# EAGLE board SyncScan Standalone MK3 SMD (EAGLE 6.2)
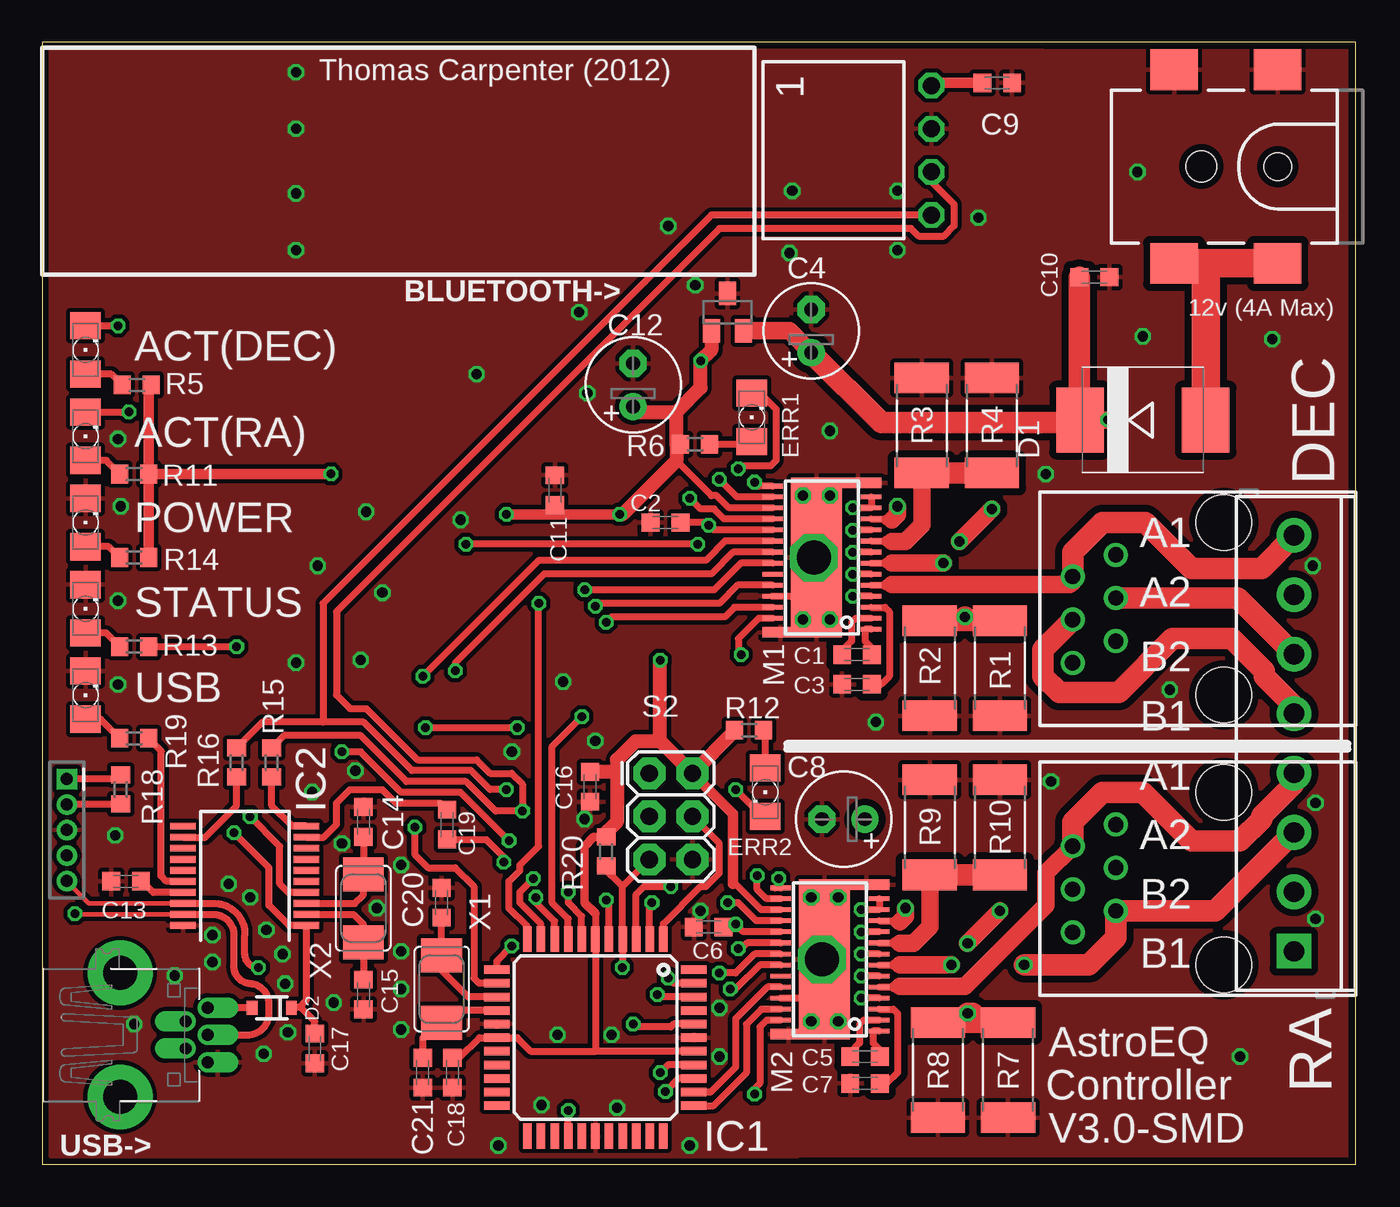
[diagram p0: board, top side]
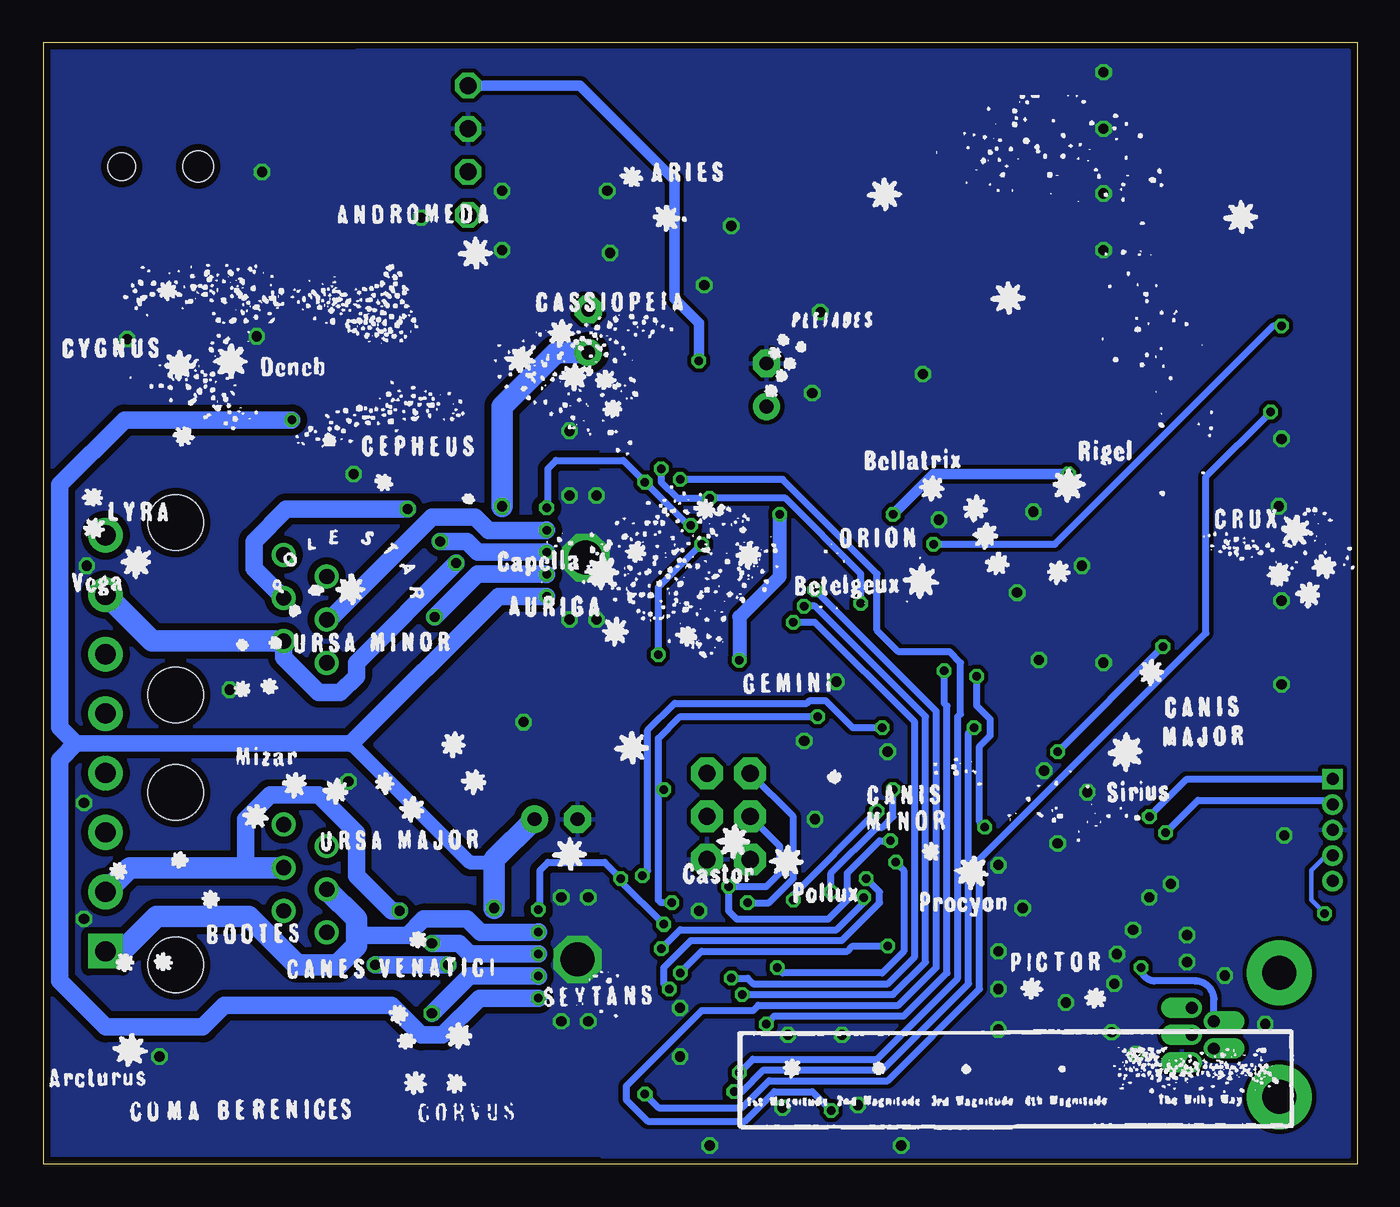
[diagram p1: board, bottom side, seen from below]

Size 77.31 x 66.04 mm. Coordinates in mm from the lower left corner, seen from the top.
Outline: 0,66.04 0,0 77.31,0 77.31,66.04 0,66.04
Copper layers (1*16): Top 0.035mm / dielectric 1.5mm / Bottom 0.035mm
Design rules: minimum track width 0.2mm, minimum drill 0.5mm, track to track 0.2mm, track to pad 0.2mm, pad to pad 0.2mm, via to via 0.2mm, smd to smd 0mil, copper to edge 10mil, drill to drill 0.2mm, minimum pad ring 10mil, minimum via ring 7mil, stop-mask expansion 0.125mm, vias tented up to drill 0mil, thermal gap 10mil
Net classes: 1 power: width 0.61 mm, drill 0.711 mm, clearance 0.203 mm; 2 gnd: width 0.305 mm, drill 0.711 mm, clearance 0.203 mm; 3 usbvcc: width 0.508 mm, drill 0.711 mm, clearance 0.203 mm

## Footprints (pad centres in the part's own frame; a part is rotated, then mirrored left to right if it is on the bottom)
1206 = smd 1.6 x 1.803: A -1.422,0; C 1.422,0
SSW-104-02-S-S-RA = drill 1 pad 1.5 octagon: 1 -3.81,1.524; 2 -1.27,1.524; 3 1.27,1.524; 4 3.81,1.524
C0603K = smd 1.05 x 1.08: 1 -0.875,0; 2 0.875,0
E2,5-6 = drill 0.813 pad 1.6: + -1.27,0 | drill 0.813 pad 1.6 octagon: - 1.27,0
SMC = smd 2.8 x 3.8: A 3.7,0; C -3.7,0
SOD-323 = smd 0.63 x 0.83: 1 -1.15,0; 2 1.15,0
RJ11-NO_SHIELD = drill 0.9 pad 1.4: 1 -3.175,8.89; 2 -1.905,6.35; 3 -0.635,8.89; 4 0.635,6.35; 5 1.905,8.89; 6 3.175,6.35 | hole 3.251: -5.08,0; 5.08,0
TQFP44 = smd 1.5 x 0.5: 1 -5.8,4; 2 -5.8,3.2; 3 -5.8,2.4; 4 -5.8,1.6; 5 -5.8,0.8; 6 -5.8,0; 7 -5.8,-0.8; 8 -5.8,-1.6; 9 -5.8,-2.4; 10 -5.8,-3.2; 11 -5.8,-4; 23 5.8,-4; 24 5.8,-3.2; 25 5.8,-2.4; 26 5.8,-1.6; 27 5.8,-0.8; 28 5.8,0; 29 5.8,0.8; 30 5.8,1.6; 31 5.8,2.4; 32 5.8,3.2; 33 5.8,4 | smd 0.5 x 1.5: 12 -4,-5.8; 13 -3.2,-5.8; 14 -2.4,-5.8; 15 -1.6,-5.8; 16 -0.8,-5.8; 17 0,-5.8; 18 0.8,-5.8; 19 1.6,-5.8; 20 2.4,-5.8; 21 3.2,-5.8; 22 4,-5.8; 34 4,5.8; 35 3.2,5.8; 36 2.4,5.8; 37 1.6,5.8; 38 0.8,5.8; 39 0,5.8; 40 -0.8,5.8; 41 -1.6,5.8; 42 -2.4,5.8; 43 -3.2,5.8; 44 -4,5.8
SSOP20 = smd 0.4 x 1.5: 1 -2.925,-3.625; 2 -2.275,-3.625; 3 -1.625,-3.625; 4 -0.975,-3.625; 5 -0.325,-3.625; 6 0.325,-3.625; 7 0.975,-3.625; 8 1.625,-3.625; 9 2.275,-3.625; 10 2.925,-3.625; 11 2.925,3.625; 12 2.275,3.625; 13 1.625,3.625; 14 0.975,3.625; 15 0.325,3.625; 16 -0.325,3.625; 17 -0.975,3.625; 18 -1.625,3.625; 19 -2.275,3.625; 20 -2.925,3.625
SOT23 = smd 1 x 1.4: 1 -0.95,-1.1; 2 0.95,-1.1; 3 0,1.1
PIC-ICSP-MINI = drill 0.7 square: 1 -3,0 | drill 0.7: 2 -1.5,0; 3 0,0; 4 1.5,0; 5 3,0
POWER_JACK_SMD = smd 2.8 x 2.4: GND 0,-5.7; P$4 6.1,-5.7; VIN0 0,5.7; VIN1 6.1,5.7 | hole 1.6: 0,0 | hole 1.8: 4.5,0
HTSSOP28PWP = smd 0.27 x 1.2: 1 -4.21,-2.9; 2 -3.575,-2.9; 3 -2.925,-2.9; 4 -2.275,-2.9; 5 -1.625,-2.9; 6 -0.975,-2.9; 7 -0.325,-2.9; 8 0.325,-2.9; 9 0.975,-2.9; 10 1.625,-2.9; 11 2.275,-2.9; 12 2.925,-2.9; 13 3.575,-2.9; 15 4.21,2.9; 16 3.575,2.9; 17 2.925,2.9; 18 2.275,2.9; 19 1.625,2.9; 20 0.975,2.9; 21 0.325,2.9; 22 -0.325,2.9; 23 -0.975,2.9; 24 -1.625,2.9; 25 -2.275,2.9; 26 -2.925,2.9; 27 -3.575,2.9 | smd 0.61 x 2.735: 14 4.395,-2.132 | smd 0.61 x 2.1: 28 -4.395,2.45 | smd 9.4 x 3: EXP 0,0.318
SCREWTERMINAL-3.5MM-8 = drill 1.2 pad 2.032 square: 1 0,0 | drill 1.2 pad 2.032: 2 3.5,0; 3 7,0; 4 10.5,0; 5 14,0; 6 17.5,0; 7 21,0; 8 24.5,0
2X3 = drill 1.016 pad 1.88 octagon: 1 0,0; 2 0,2.54; 3 2.54,0; 4 2.54,2.54; 5 5.08,0; 6 5.08,2.54
R2512 = smd 1.8 x 3.2: 1 -2.8,0; 2 2.8,0
R0603 = smd 1 x 1.1: 1 -0.85,0; 2 0.85,0
USB-MINIB-THM-MOLEX = drill 0.7 offset: D+ 0,9.72; D- -0.8,8.42; GND 1.6,9.72; ID 0.8,8.42; VBUS -1.6,9.72 | drill 2 pad 3.81: GND1 -3.65,4.57; GND4 3.65,4.57
NX5032 = smd 2 x 2.4: P$1 2,0; P$2 -2,0

## Placement (x,y rotation side)
ACT(DEC)  Green  [1206]  2.54,47.94 90 top
ACT(RA)  Green  [1206]  2.54,42.86 90 top
BLUETOOTH->  http://www.ebay.co.uk/itm/250991624201  [SSW-104-02-S-S-RA]  50.8,59.69 270 top
C1  10n  [C0603K]  47.94,30 180 top
C2  100n  [C0603K]  36.67,37.78 0 top
C3  100n  [C0603K]  47.94,28.26 0 top
C4  100u  [E2,5-6]  45.24,49.05 90 top
C5  10n  [C0603K]  48.42,6.35 180 top
C6  100n  [C0603K]  39.21,13.97 0 top
C7  100n  [C0603K]  48.42,4.76 0 top
C8  100u  [E2,5-6]  47.15,20.32 180 top
C9  100n  [C0603K]  56.2,63.66 0 top
C10  100n  [C0603K]  61.91,52.23 0 top
C11  100n  [C0603K]  30.16,39.69 90 top
C12  100u  [E2,5-6]  34.77,45.88 90 top
C13  470n  [C0603K]  4.92,16.67 0 top
C14  22p  [C0603K]  18.89,20.16 90 top
C15  22p  [C0603K]  18.89,10 270 top
C16  100n  [C0603K]  32.23,22.23 270 top
C17  100n  [C0603K]  16.03,6.83 270 top
C18  100n  [C0603K]  24.13,5.4 270 top
C19  100n  [C0603K]  23.81,20 270 top
C20  22p  [C0603K]  23.5,15.4 90 top
C21  22p  [C0603K]  22.38,5.4 270 top
D1  B550C-13  [SMC]  64.77,43.81 0 top
D2  1N4148  [SOD-323]  13.49,9.21 180 top
DEC  RJ11-4X  [RJ11-NO_SHIELD]  69.53,32.7 90 top
ERR1  Red  [1206]  41.75,43.97 90 top
ERR2  Red  [1206]  42.55,21.91 270 top
IC1  ATMEGA162-16AU  [TQFP44]  32.54,7.46 270 top
IC2  PIC18F14K50-I/SS  [SSOP20]  11.91,16.99 90 top
IC3  7805L  [SOT23]  40.32,50.16 0 top
ICSP  PIC-ICSP-MINI  [PIC-ICSP-MINI]  1.43,19.68 270 top
J1  POWER_JACKSMD  [POWER_JACK_SMD]  72.71,58.74 180 top
M1  DRV8824PWP  [HTSSOP28PWP]  45.88,35.72 90 top
M2  DRV8824PWP  [HTSSOP28PWP]  46.35,12.06 90 top
MOTOR2  Screw Terminal  [SCREWTERMINAL-3.5MM-8]  73.66,12.54 90 top
POWER  Red  [1206]  2.54,37.78 90 top
PROG  PRG  [2X3]  35.72,23.02 270 top
R1  1.5R  [R2512]  56.36,29.21 90 top
R2  1.5R  [R2512]  52.23,29.21 90 top
R3  1.5R  [R2512]  51.75,43.5 270 top
R4  1.5R  [R2512]  55.88,43.5 270 top
R5  1k  [R0603]  5.56,45.88 0 top
R6  1k  [R0603]  38.42,42.39 180 top
R7  1.5R  [R2512]  56.83,5.56 90 top
R8  1.5R  [R2512]  52.7,5.56 90 top
R9  1.5R  [R2512]  52.23,19.84 270 top
R10  1.5R  [R2512]  56.36,19.84 270 top
R11  1k  [R0603]  5.4,40.64 0 top
R12  1k  [R0603]  41.59,25.56 180 top
R13  1k  [R0603]  5.4,30.48 180 top
R14  1k  [R0603]  5.4,35.72 180 top
R15  1k  [R0603]  13.49,23.65 270 top
R16  1k  [R0603]  11.43,23.65 270 top
R18  10k  [R0603]  4.6,22.07 270 top
R19  1k  [R0603]  5.4,25.08 0 top
R20  10k  [R0603]  33.18,18.41 90 top
RA  RJ11-4X  [RJ11-NO_SHIELD]  69.53,16.83 90 top
STATUS  Green  [1206]  2.54,32.7 90 top
USB  Green  [1206]  2.54,27.62 90 top
USB->  Molex 565790519  [USB-MINIB-THM-MOLEX]  0,7.62 270 top
X1  16MHz  [NX5032]  23.5,10.32 270 top
X2  12MHz  [NX5032]  18.89,15.08 90 top

## Library data of the parts
ACT(DEC) ACT(RA) STATUS USB = led; MF: KINGBRIGHT; MPN: L-424GDT; OC_FARNELL: 1142496
BLUETOOTH-> = con-samtec; OC_FARNELL: unknown; OC_NEWARK: 11P9385
C1 C5 = resistor; MF: KEMET; MPN: C0603C103K1RACTU; OC_FARNELL: 1865545
C2 C3 C6 C7 C9-C11 C16-C19 = resistor; MF: KEMET; MPN: C0603C104K4RACTU; OC_FARNELL: 1414610
C4 C8 C12 = resistor; MF: MULTICOMP; MPN: MCGPR25V107M6.3X11; OC_FARNELL: 9451188
C13 = rcl; MF: AVX; MPN: 0603ZD474KAT2A; OC_FARNELL: 1833805
C14 C15 C20 C21 = rcl; MF: MULTICOMP; MPN: U0603C220JCT; OC_FARNELL: 9406107
D1 = diode; MF: DIODES INC.; MPN: B550C-13-F; OC_FARNELL: 1858608
D2 = SparkFun; MF: MULTICOMP; MPN: 1N4148.; OC_FARNELL: 9565124
DEC RA = con-tycoelectronics; MF: MH CONNECTORS; MPN: MHRJJ64NFRA; OC_FARNELL: 3938347; OC_NEWARK: 19R7022
ERR1 ERR2 POWER = led; MF: KINGBRIGHT; MPN: L-424HDT; OC_FARNELL: 1142499
IC1 = atmel; MF: ATMEL; MPN: ATMEGA162-16AU; OC_FARNELL: 9171150
IC2 = microchip; MF: MICROCHIP; MPN: PIC18F14K50-I/SS; OC_FARNELL: 1648504
IC3 = v-reg; MF: TAIWAN SEMICONDUCTOR; MPN: TS78L05CX RF; OC_FARNELL: 1476698
ICSP = SparkFun; OC_FARNELL: unknown
J1 = SparkFun; MF: MULTICOMP; MPN: MJ-179SMT; OC_FARNELL: 1737262
M1 M2 = texas; MF: TEXAS INSTRUMENTS; MPN: DRV8824PWP; OC_FARNELL: 1815786
MOTOR2 = SparkFun; MF: LUMBERG; MPN: KRMC 08; OC_FARNELL: 1217307
PROG = SparkFun; MF: TE CONNECTIVITY / AMP; MPN: 826632-3; OC_FARNELL: 3418492
R1-R4 R7-R10 = resistor; MF: YAGEO (PHYCOMP); MPN: RC2512FK-7W1R5L; OC_FARNELL: 1840520
R5 R6 R11 R12 = resistor; MF: VISHAY DRALORIC; MPN: CRCW06031K00FKEA; OC_FARNELL: 1469740
R13 R14 R19 = rcl; MF: VISHAY DRALORIC; MPN: CRCW06031K00FKEA; OC_FARNELL: 1469740
R15 R16 = SmartPrj; MF: VISHAY DRALORIC; MPN: CRCW06031K00FKEA; OC_FARNELL: 1469740
R18 R20 = rcl; MF: VISHAY DRALORIC; MPN: CRCW060310K0FKEA; OC_FARNELL: 1469748
USB-> = adafruit; MF: MOLEX; MPN: 565790519; OC_FARNELL: 1125347
X1 = adafruit; MF: TXC; MPN: 7A-16.000MAAJ-T; OC_FARNELL: 1841946
X2 = adafruit; MF: TXC; MPN: 7A-12.000MAAJ-T; OC_FARNELL: 1841940

## Nets
3.3V-1: C2.2 M1.12 M1.13 M1.15 M1.19
3.3V-2: C6.2 M2.12 M2.13 M2.15 M2.19
!EN-1: IC1.40 M1.21
!EN-2: IC1.12 M2.21
!ERR-1: ERR1.C IC1.11 M1.18
!ERR-2: ERR2.C IC1.8 M2.18
!HOME-1: ACT(DEC).C M1.27
!HOME-2: ACT(RA).C M2.27
!RST-1: IC1.37 M1.16
!RST-2: IC1.36 M2.16
+5V: BLUETOOTH->.1 C9.1 C11.1 C12.+ C16.1 C18.1 IC1.6 IC1.17 IC1.38 IC3.1 M1.17 M2.17 PROG.2 R5.2 R6.2 R11.2 R12.2 R14.1 R20.2
A1-1: DEC.5 M1.5 MOTOR2.8
A1-2: M2.5 MOTOR2.4 RA.5
A2-1: DEC.2 M1.7 MOTOR2.7
A2-2: M2.7 MOTOR2.3 RA.2
AVROSC1: C21.1 IC1.15 X1.P$1
AVROSC2: C20.1 IC1.14 X1.P$2
B1-1: DEC.3 M1.10 MOTOR2.5
B1-2: M2.10 MOTOR2.1 RA.3
B2-1: DEC.4 M1.8 MOTOR2.6
B2-2: M2.8 MOTOR2.2 RA.4
CP1-1: C1.1 M1.1
CP1-2: C5.1 M2.1
CP2-1: C1.2 M1.2
CP2-2: C5.2 M2.2
D+: IC2.19 ICSP.4 USB->.D+
D-: IC2.18 ICSP.5 USB->.D-
DIR-1: IC1.13 M1.20
DIR-2: IC1.9 M2.20
GND: BLUETOOTH->.2 C2.1 C3.1 C4.- C6.1 C7.1 C8.- C9.2 C10.2 C11.2 C12.- C13.1 C14.2 C15.2 C16.2 C17.2 C18.2 C20.2 C21.2 IC1.16 IC1.28 IC1.39 IC2.20 IC3.3 ICSP.3 J1.GND J1.P$4 M1.14 M1.25 M1.28 M1.EXP M2.14 M2.25 M2.28 M2.EXP POWER.C PROG.6 R1.1 R2.1 R3.1 R4.1 R7.1 R8.1 R9.1 R10.1 STATUS.C USB->.GND USB.C
ISENA-1: M1.6 R1.2 R2.2
ISENA-2: M2.6 R7.2 R8.2
ISENB-1: M1.9 R3.2 R4.2
ISENB-2: M2.9 R9.2 R10.2
LED1: ERR1.A R6.1
LED2: ACT(DEC).A R5.1
LED3: ERR2.A R12.1
LED4: ACT(RA).A R11.1
M0-1: IC1.42 M1.24
M0-2: IC1.35 M2.24
M2-1: IC1.43 M1.26
M2-2: IC1.34 M2.26
MCLR: IC2.4 ICSP.1 R18.1
MISO: IC1.2 PROG.1
MOSI: IC1.1 PROG.4
N$1: C3.2 M1.3
N$2: C19.1 IC2.9
PWRLED: POWER.A R14.2
RESET: C19.2 IC1.4 PROG.5 R20.1
RX(BTH): BLUETOOTH->.4 IC1.7 R16.1
RX(USB): IC2.12 R16.2
SCLK: IC1.3 PROG.3 R13.1
STATLED: R13.2 STATUS.A
STEP-1: IC1.26 M1.22
STEP-2: IC1.10 M2.22
TX(BTH): BLUETOOTH->.3 IC1.5 R15.1
TX(USB): IC2.10 R15.2
USBLED: R19.1 USB.A
USBOSC1: C15.1 IC2.2 X2.P$2
USBOSC2: C14.1 IC2.3 X2.P$1
USBSTAT: IC2.16 R19.2
V+: C4.+ C8.+ C10.1 D1.C IC3.2 M1.4 M1.11 M2.4 M2.11
VBUS: D2.2 USB->.VBUS
VCP-2: C7.2 M2.3
VIN: D1.A J1.VIN0 J1.VIN1
VPIC: C17.1 D2.1 IC2.1 ICSP.2 R18.2
VUSB: C13.2 IC2.17

## Tracks (layer width: path | path; a pad name or v marks a point on that pad's centre or on a via)
3.3V-1  (via drill 0.5)
  Top 0.406: v47.7,38.66 47.72,38.64 M1.12 M1.13 | M1.15 42.15,39.93 v41.91,40.16 | M1.19 39.49,37.34 v39.21,37.62 39.05,37.78 C2.2
  Bottom 0.406: v47.7,38.66 47.62,38.73 47.62,40.96 47.15,41.43 43.18,41.43 v41.91,40.16 39.37,37.62 v39.21,37.62
3.3V-2  (via drill 0.5)
  Top 0.406: v48.18,15 48.19,14.99 M2.12 M2.13 | 43.1,16.27 M2.15 43.45,16.39 43.34,16.51 v43.34,16.83 | M2.19 41.24,13.69 v40.8,14.13 40.64,13.97 C6.2
  Bottom 0.406: v48.18,15 48.1,15.08 48.1,17.3 47.62,17.78 44.29,17.78 v43.34,16.83 43.34,16.67 v40.8,14.13
!EN-1  (via drill 0.5)
  Top 0.406: M1.21 40.65,36.04 39.37,34.77 29.53,34.77 24.29,29.53 v24.29,29.05 | IC1.40 37.15,8.26 36.99,8.1 34.92,8.1 v34.77,8.26 v34.76,8.26
  Bottom 0.406: v34.77,8.26 34.29,8.73 26.67,8.73 24.13,11.27 24.13,26.99 24.29,27.15 v24.29,29.05
!EN-2  (via drill 0.5)
  Top 0.406: M2.21 41.92,12.39 40.8,11.27 v39.85,11.27 | IC1.12 26.74,11.98 v27.62,12.86
  Bottom 0.406: v39.85,11.27 38.58,12.54 30,12.54 29.69,12.86 v27.62,12.86
!ERR-1  (via drill 0.5)
  Top 0.406: M1.18 40.11,37.99 39.53,38.58 38.73,38.58 v38.1,39.21 | IC1.11 28.54,14 27.46,15.08 27.46,16.67 28.1,17.3 28.1,17.62 29.21,18.73 v29.21,33.02 | ERR1.C 42.23,45.4 43.18,44.45 43.18,41.43 42.86,41.12 41.12,41.12 v40.96,40.96
  Bottom 0.406: v29.21,33.02 29.21,34.77 33.66,39.21 v38.1,39.21 40.01,39.21 40.96,40.16 v40.96,40.96
!ERR-2  (via drill 0.5)
  Top 0.406: M2.18 42.02,14.34 40.96,15.4 v40.32,15.4 | IC1.8 30.94,14.46 30,15.4 30,24.61 v31.75,26.35 | ERR2.C 42.06,20.48 42.07,20.48 42.07,20.8 v40.8,22.07
  Bottom 0.406: v40.32,15.4 40.96,15.4 41.12,15.56 41.12,22.23 | 41.12,22.23 41.12,25.08 39.85,26.35 v31.75,26.35 | v40.8,22.07 40.96,22.07 41.12,22.23
!HOME-1  (via drill 0.5)
  Top 0.406: M1.27 42.15,32.14 40.96,30.96 40.96,30.16 v41.12,30 | v38.58,36.51 v24.92,36.51 | ACT(DEC).C 4.44,49.36 v4.45,49.37
  Bottom 0.406: v41.12,30 41.12,33.97 v38.58,36.51 | v24.92,36.51 17.78,36.51 4.92,49.37 v4.45,49.37
!HOME-2  (via drill 0.5)
  Top 0.406: M2.27 42.62,8.49 42.23,8.1 42.23,4.76 41.91,4.45 v41.91,4.13 | ACT(RA).C v5.07,44.28 v5.08,44.29
  Bottom 0.406: v41.91,4.13 41.12,3.33 36.2,3.33 34.61,4.92 27.62,4.92 22.23,10.32 22.23,17.94 8.89,31.27 8.89,40.48 v5.08,44.29
!RST-1  (via drill 0.5)
  Top 0.406: M1.16 40.88,39.29 v39.85,40.32 | IC1.37 36.82,5.86 v36.35,5.4
  Bottom 0.406: v36.35,5.4 35.56,6.19 28.26,6.19 23.5,10.95 23.5,26.35 23.34,26.51 23.34,29.53 23.97,30.16 26.99,30.16 28.26,31.43 28.26,34.77 33.81,40.32 v39.85,40.32
!RST-2  (via drill 0.5)
  Top 0.406: M2.16 42.62,15.64 42.07,16.19 v42.07,16.99 | IC1.36 37.45,5.06 v36.67,4.29 | v22.54,25.72 v27.94,25.72
  Bottom 0.406: v36.67,4.29 36.2,4.29 34.92,5.56 27.94,5.56 22.86,10.64 22.86,25.4 v22.54,25.72 | v42.07,16.99 41.75,17.3 41.75,25.56 40.16,27.15 32.38,27.15 32.23,27.3 31.27,27.3 29.69,25.72 v27.94,25.72
+5V  (via drill 0.5)
  Top 0.406: 32.54,14.76 IC1.6 32.54,6.67 | M2.17 42.32,14.99 40.8,16.51 40.64,16.51 | M1.17 40.41,38.64 39.69,39.37 39.37,39.37 37.31,41.43 | 32.54,6.67 28.73,6.67 27.94,7.46 IC1.17 25.72,7.46 24.53,6.27 C18.1 | IC1.38 32.55,6.66 32.54,6.67
  Top 0.508: 32.92,19.27 32.44,19.27 31.91,18.73 31.91,15.4 32.54,14.76
  Top 0.61: 40.64,16.51 40.64,20.64 PROG.2 | C9.1 52.48,63.66 BLUETOOTH->.1 | v33.97,38.26 30.16,38.26 | 30.16,38.26 v27.3,38.26 | v16.99,40.64 R11.2 | R11.2 6.19,40.64 | R11.2 R14.1 | R11.2 6.25,45.72 R5.2 | C11.1 30.16,38.26
  Top 0.813: 36.35,24.92 PROG.2 40.74,25.5 R12.2 | 33.81,23.1 33.81,20.16 32.92,19.27 R20.2 | 33.81,23.1 33.81,23.81 34.92,24.92 36.35,24.92 | 33.81,23.1 C16.1 | 37.31,42.39 37.31,44.29 | 37.31,44.29 38.73,45.72 v38.73,47.31 39.37,47.95 IC3.1 | R6.2 37.31,42.39 | 37.31,42.39 37.31,41.43 34.13,38.26 v33.97,38.26 | C12.+ 35.08,44.29 37.31,44.29 | 36.35,24.92 v36.35,29.69
  Bottom 0.61: v38.73,47.31 38.73,49.53 40.16,50.96 40.16,57.94 45.72,63.5 BLUETOOTH->.1 | v27.3,38.26 24.92,40.64 v16.99,40.64
  Bottom 0.813: v33.97,38.26 33.97,34.61 36.35,32.23 v36.35,29.69
A1-1
  Top 0.406: M1.5 49.65,34.09
  Top 0.61: 49.65,34.09 49.69,34.13 50.01,34.13
  Top 1.016: 50.01,34.13 60.48,34.13 60.64,34.29 DEC.5
  Top 1.27: DEC.5 60.64,36.04 62.39,37.78 64.93,37.78 67.63,35.08 71.75,35.08 73.66,36.99 MOTOR2.8
A1-2
  Top 0.406: M2.5 50.13,10.44
  Top 0.61: 50.13,10.44 50.16,10.48 50.48,10.48
  Top 1.016: 50.48,10.48 54.29,10.48 59.05,15.24 59.05,17.14 RA.5
  Top 1.27: RA.5 60.64,20.16 62.39,21.91 64.77,21.91 67.63,19.05 70.48,19.05 71.75,20.32 71.75,20.5 73.66,22.41 MOTOR2.4
A2-1  (via drill 0.6)
  Top 0.406: M1.7 49.68,35.39
  Top 0.61: 49.68,35.39 50,35.39 50.01,35.4
  Top 1.016: 50.01,35.4 50.01,35.39 v53.02,35.39 v53.02,35.4
  Bottom 1.016: v53.02,35.4 58.9,29.53 58.9,28.73 59.85,27.78 61.12,27.78 63.18,29.84 DEC.2
  Bottom 1.27: MOTOR2.7 70.92,30.8 DEC.2
A2-2  (via drill 0.6)
  Top 0.406: M2.7 50.16,11.74
  Top 0.61: 50.16,11.74 50.48,11.74 50.48,11.75
  Top 1.016: 50.48,11.75 50.49,11.74 v53.49,11.74 v53.5,11.75
  Top 1.27: MOTOR2.3 69.04,14.92 RA.2 63.18,13.34 61.59,11.75 v57.78,11.75
  Bottom 1.016: v53.5,11.75 v57.78,11.75
AVROSC1
  Top 0.406: IC1.15 24.14,9.06 23.5,8.41 X1.P$1 23.24,8.32 22.38,7.46 C21.1
AVROSC2
  Top 0.406: C20.1 X1.P$2 23.5,11.43 25.06,9.86 IC1.14
B1-1  (via drill 0.5)
  Top 0.406: M1.10 v47.71,37.34 v47.7,37.34
  Top 1.27: MOTOR2.5 73.66,26.99 71.91,28.73 71.91,29.05 70.01,30.96 66.52,30.96 63.34,27.78 59.85,27.78 58.9,28.73 58.9,30.32 DEC.3
  Bottom 1.016: v47.7,37.34 47.74,37.31 51.12,37.31 51.91,38.1 54.45,38.1 60.48,32.07 DEC.3
B1-2  (via drill 0.5)
  Top 0.406: M2.10 v48.19,13.69 v48.18,13.68
  Bottom 1.016: v48.18,13.68 48.21,13.65 51.59,13.65 52.39,14.45 54.93,14.45 55.88,13.49 58.9,13.49
  Bottom 1.27: MOTOR2.1 72.71,12.54 70.64,14.61 65.25,14.61 62.39,11.75 60.01,11.75 58.9,12.86 58.9,13.49 58.9,14.45 RA.3
B2-1  (via drill 0.5, 0.6)
  Top 0.406: M1.8 v47.71,36.04 v47.7,36.04
  Top 1.016: v53.98,36.67 v55.88,38.58
  Top 1.27: MOTOR2.6 70.36,33.34 DEC.4
  Bottom 1.016: v47.7,36.04 v47.71,36.04 51.75,36.04 52.39,36.67 v53.98,36.67 | v55.88,38.58 63.02,38.58 64.93,36.67 64.93,35.08 DEC.4
B2-2  (via drill 0.5, 0.6)
  Top 0.406: M2.8 v48.18,12.39
  Top 1.016: v54.45,13.02 v56.36,14.92
  Bottom 1.016: v48.18,12.39 v48.19,12.38 52.23,12.38 52.86,13.02 v54.45,13.02 | v56.36,14.92 56.83,14.92 58.9,16.99 58.9,19.53 61.12,21.75 63.98,21.75 65.41,20.32 65.41,17.46
  Bottom 1.27: RA.4 65.41,17.46 72.24,17.46 MOTOR2.2
CP1-1
  Top 0.406: M1.1 48.42,31.51 48.42,30.8 48.82,30.4 C1.1
CP1-2
  Top 0.406: M2.1 48.9,7.86 48.9,7.14 49.29,6.75 C5.1
CP2-1
  Top 0.406: M1.2 47.86,32.14 47.62,31.91 47.62,30.8 47.07,30.24 C1.2
CP2-2
  Top 0.406: M2.2 48.34,8.49 48.1,8.26 48.1,7.14 47.54,6.59 C5.2
D+  (via drill 0.5)
  Top 0.279: IC2.19 1.96,14.71 v1.91,14.76
  Top 0.406: USB->.D+ 12.06,7.62 arc90 13.34,8.89 13.34,9.37 arc90 12.22,10.64 arc-90 11.27,11.75 11.27,13.49 arc90 10.05,14.71 IC2.19
  Bottom 0.279: ICSP.4 1.82,18.18 2.7,17.3 2.7,15.56 v1.91,14.76
D-  (via drill 0.5)
  Top 0.279: IC2.18 2.74,15.36 ICSP.5
  Top 0.406: v12.7,11.59 arc-90 11.91,12.38 11.91,13.49 arc90 10.2,15.36 IC2.18
  Bottom 0.406: USB->.D- 8.42,9.69 arc-90 9.53,10.79 11.91,10.79 arc90 v12.7,11.59
DIR-1  (via drill 0.5)
  Top 0.406: M1.20 40.19,36.69 39.05,35.56 29.21,35.56 v22.38,28.73 | v21.91,19.84 21.91,18.26 22.7,17.46 24.29,17.46 25.4,16.35 25.4,10.95 25.69,10.66 IC1.13
  Bottom 0.406: v21.91,19.84 22.23,20.16 22.23,24.61 21.59,25.24 21.59,26.19 22.38,26.99 v22.38,28.73
DIR-2  (via drill 0.5)
  Top 0.406: M2.20 41.46,13.04 41.12,12.7 v40.96,12.7 | IC1.9 30.14,14.31 29.05,15.4 v29.05,15.72
  Bottom 0.406: v40.96,12.7 39.85,13.81 30.64,13.81 29.05,15.4 v29.05,15.72
GND  (via drill 0.6, 2)
  Top 0.406: M1.25 45.3,33.44 46.35,32.38 v46.35,32.07 | M2.25 45.45,9.79 v46.83,8.41
  other vias: 29.37,3.49 21.11,17.62 70.48,6.35 74.77,35.24 4.6,38.73 18.73,29.69 19.05,38.42 21.11,12.54 21.11,10.32 4.45,42.7 43.97,53.66 14.92,53.82 14.92,64.29 14.92,60.96 31.91,20.32 64.77,48.74 24.61,37.94 30.64,28.42 26.83,1.11 4.45,28.26 32.07,45.4 74.93,21.27 64.45,58.42 32.54,24.92 10.95,16.51 17.14,9.53 21.11,7.94 49.05,26.04 27.62,24.29 38.1,1.11 7.78,11.11 14.92,29.53 14.92,57.15 4.29,19.37 38.73,14.92 50.32,57.31 14.29,10.64 10,11.91 5.4,8.26 13.02,6.51 14.13,12.38 12.22,15.72 14.45,7.78 13.18,13.81 19.68,15.08 10,13.49 31.59,50.16 50.32,53.82 74.93,14.45 17.62,18.89 59.05,40.64 16.19,35.24 44.13,57.31 20,33.66 30.32,7.62 33.81,3.33 66.36,27.94 33.5,7.62 36.83,55.24 46.35,43.18 4.45,33.18 38.42,51.75 59.37,22.54 25.56,46.51 72.39,48.58 55.09,55.72 45.88,12.06 45.24,8.41 45.24,15.72 46.83,15.72 44.77,32.07 45.4,35.72 44.77,39.37 46.35,39.37 18.41,23.18 15.88,21.91 39.85,6.35 39.85,9.21
  pour Top (isolate 0.406, rank 2): 43.18,66.04 77.31,66.04 77.31,0 44.45,0 44.45,40.64 43.18,41.91
  pour Top (isolate 0.254, rank 2): 0.48,0.48 44.45,0.48 44.45,46.67 43.81,47.31 43.81,50.96 44.93,52.07 53.34,52.07 59.69,58.42 59.69,64.77 58.9,65.56 0.48,65.56
  pour Bottom (isolate 0.254, rank 2): 0.48,0.48 44.45,0.48 44.45,46.67 43.81,47.31 43.81,50.96 44.93,52.07 53.34,52.07 59.69,58.42 59.69,64.77 58.9,65.56 0.48,65.56
  pour Bottom (isolate 0.406, rank 2): 43.18,66.04 77.31,66.04 77.31,0 44.45,0 44.45,40.64 43.18,41.91
ISENA-1  (via drill 0.5, 0.6)
  Top 0.406: M1.6 47.71,34.74 v47.7,34.73
  Top 1.27: R1.2 54.29,32.01 | 54.29,32.01 R2.2 | 54.29,32.01 v54.29,32.23
  Bottom 1.016: v47.7,34.73 47.74,34.77 51.75,34.77 v54.29,32.23
ISENA-2  (via drill 0.5, 0.6)
  Top 0.406: M2.6 v48.19,11.09 v48.18,11.08
  Top 1.27: R7.2 54.77,8.36 | 54.77,8.36 R8.2 | 54.77,8.36 54.77,8.89 v54.45,8.89
  Bottom 1.016: v48.18,11.08 48.21,11.11 52.23,11.11 v54.45,8.89
ISENB-1
  Top 0.406: M1.9 49.67,36.69
  Top 0.61: 50.01,36.67 49.69,36.67 49.67,36.69
  Top 1.016: 50.01,36.67 50.8,36.67 51.75,37.62 51.75,40.64
  Top 1.27: 51.75,40.64 51.7,40.64 R3.2 R4.2
ISENB-2
  Top 0.406: M2.9 50.14,13.04
  Top 0.61: 50.48,13.02 50.16,13.02 50.14,13.04
  Top 1.016: 50.48,13.02 51.28,13.02 52.23,13.97 52.23,16.99
  Top 1.27: 52.23,16.99 52.17,16.99 R9.2 R10.2
LED1
  Top 0.406: R6.1 41.59,42.39 ERR1.A
LED2
  Top 0.406: R5.1 4.07,46.51 ACT(DEC).A
LED3
  Top 0.406: ERR2.A 42.55,25.4 42.39,25.56 R12.1
LED4
  Top 0.406: R11.1 3.75,41.43 ACT(RA).A
M0-1  (via drill 0.5)
  Top 0.406: M1.24 40.92,34.09 39.85,33.02 32.7,33.02 v32.54,32.86 | IC1.42 36.34,9.86 v36.2,10
  Bottom 0.406: v36.2,10 27.3,10 25.4,11.91 25.4,26.35 31.91,32.86 v32.54,32.86
M0-2
  Top 0.406: M2.24 42.67,10.44 40.8,8.57 40.8,5.71 39.34,4.26 IC1.35
M2-1  (via drill 0.5)
  Top 0.406: M1.26 40.73,32.79 40.16,32.23 33.5,32.23 v33.18,31.91 | IC1.43 37.12,10.66 v36.83,10.95
  Bottom 0.406: v36.83,10.95 35.88,10.95 35.56,10.64 27.62,10.64 26.04,12.22 26.04,26.04 31.91,31.91 v33.18,31.91
M2-2
  Top 0.406: M2.26 42.32,9.14 41.43,8.26 41.43,5.4 39.5,3.46 IC1.34
MCLR  (via drill 0.5)
  Top 0.406: IC2.4 14.47,16.01 13.97,16.51 13.97,18.73 v12.22,20.48 | R18.1 4.37,22.68 ICSP.1
  Bottom 0.406: v12.22,20.48 10.02,22.68 ICSP.1
MISO  (via drill 0.5)
  Top 0.406: IC1.2 35.74,15.21 35.88,15.35 v35.88,15.4
  Bottom 0.406: v35.88,15.4 34.61,15.4 33.18,16.83 33.18,20.48 PROG.1
MOSI
  Top 0.406: IC1.1 36.54,14.16 38.73,16.35 39.05,16.35 39.85,17.14 39.85,18.89 PROG.4
N$1
  Top 0.406: M1.3 49.6,32.79 49.85,32.54 49.85,28.73 49.37,28.26 C3.2
N$2
  Top 0.406: IC2.9 16.56,19.26 17.3,20 17.3,21.27 18.1,22.07 20,22.07 20.8,21.27 23.42,21.27 C19.1
PWRLED
  Top 0.406: R14.2 3.91,36.36 POWER.A
RESET  (via drill 0.5)
  Top 0.406: 34.14,16.36 IC1.4 v34.13,11.59 | 34.14,16.36 PROG.5 | R20.1 32.92,17.57 34.13,16.35 34.14,16.36 | v27.15,17.78 27.15,18.1 26.12,19.13 C19.2
  Bottom 0.406: v27.15,17.78 26.67,17.3 26.67,12.54 27.94,11.27 33.81,11.27 v34.13,11.59
RX(BTH)  (via drill 0.5)
  Top 0.406: IC1.7 31.74,14.61 30.96,15.4 v30.96,16.03 | v27.3,22.07 26.35,22.07 25.24,23.18 21.75,23.18 18.89,26.04 16.51,26.04 | 16.51,26.04 12.96,26.04 R16.1 | BLUETOOTH->.4 39.37,55.88 16.51,33.02 16.51,26.04
  Bottom 0.406: v30.96,16.03 30.96,17.14 28.26,19.84 27.94,19.84 27.3,20.48 v27.3,22.07
RX(USB)
  Top 0.406: IC2.12 9.58,19.26 11.43,21.11 R16.2
SCLK  (via drill 0.5)
  Top 0.406: IC1.3 34.94,15.89 35.4,16.35 v36.99,16.35 | v27.46,19.05 24.61,21.91 21.11,21.91 18.73,24.29 v17.62,24.29 | R13.1 v11.43,30.48
  Bottom 0.406: PROG.3 33.97,18.73 33.97,17.14 34.77,16.35 v36.99,16.35 36.99,14.92 36.51,14.45 31.11,14.45 30,15.56 30,17.14 28.1,19.05 v27.46,19.05 | v17.62,24.29 v11.43,30.48
STATLED
  Top 0.406: R13.2 3.75,31.28 STATUS.A
STEP-1  (via drill 0.5)
  Top 0.406: M1.22 41.11,35.39 39.53,33.81 v31.91,33.81 | IC1.26 30.94,3.16 v30.96,3.17
  Bottom 0.406: v31.91,33.81 24.77,26.67 24.77,11.59 26.99,9.37 35.24,9.37 35.56,9.05 38.58,9.05 43.02,4.6 43.02,3.81 41.75,2.54 36.04,2.54 34.29,4.29 32.07,4.29 v30.96,3.17
STEP-2  (via drill 0.5)
  Top 0.406: M2.22 42.22,11.74 40.8,10.32 v40.48,10.32 | IC1.10 29.34,14.15 28.1,15.4 28.1,16.03 v28.89,16.83
  Bottom 0.406: v40.48,10.32 40.8,10.64 40.8,11.59 39.21,13.18 30.32,13.18 28.1,15.4 28.1,16.03 v28.89,16.83
TX(BTH)  (via drill 0.5)
  Top 0.406: IC1.5 33.34,15.39 v33.18,15.56 | R15.1 14.23,25.24 18.73,25.24 21.43,22.54 24.92,22.54 26.67,20.8 v28.26,20.8 28.26,22.38 27.62,23.02 26.35,23.02 25.56,23.81 22.07,23.81 19.05,26.83 18.1,26.83 17.3,27.62 17.3,32.54 39.85,55.09 51.12,55.09 51.59,54.61 53.02,54.61 53.66,55.24 53.66,56.52 52.32,57.85 BLUETOOTH->.3
  Bottom 0.406: v33.18,15.56 33.18,15.88 v28.26,20.8
TX(USB)
  Top 0.406: IC2.10 14.7,19.91 13.49,21.11 R15.2
USBLED
  Top 0.406: R19.1 3.43,26.2 USB.A
USBOSC1
  Top 0.406: IC2.2 18.31,14.71 18.89,14.13 X2.P$2 C15.1
USBOSC2
  Top 0.406: IC2.3 18.38,15.36 18.89,15.88 X2.P$1 C14.1
USBSTAT
  Top 0.406: IC2.16 7.29,16.66 6.99,16.97 6.99,24.13 6.99,24.29 6.99,24.34 R19.2
V+  (via drill 0.5, 0.6)
  Top 0.406: M2.4 v48.19,9.79 v48.18,9.79 | M2.11 50.11,14.34 50.16,14.29 | M1.4 v47.71,33.44 v47.7,33.44 | M1.11 49.64,37.99 49.69,37.94
  Top 0.61: 50.16,14.29 50.48,14.29 | 49.69,37.94 50.01,37.94
  Top 1.016: 50.48,14.29 50.8,14.61 v50.8,15.08 | 50.01,37.94 50.32,38.26 v50.32,38.73 | D1.C v62.71,43.81 | C4.+ 43.96,49.06 IC3.2
  Top 1.27: D1.C 61.04,43.81 C10.1 | 60.64,43.66 49.37,43.66 C4.+
  Top 1.676: 61.04,43.81 61.04,43.97 60.96,43.97 60.64,43.66
  Bottom 0.813: 59.21,24.77 52.23,17.78 50.8,17.78
  Bottom 0.965: 59.21,24.77 75.41,24.77
  Bottom 1.016: v48.18,9.79 51.65,9.79 53.82,7.62 55.09,7.62 56.83,9.37 66.67,9.37 67.94,8.1 73.66,8.1 76.36,10.79 76.36,23.81 75.41,24.77 76.36,25.72 76.36,40.01 72.55,43.81 v62.71,43.81 | v47.7,33.44 50.54,33.44 59.21,24.77
  Bottom 1.27: C8.+ 50.8,17.94 50.8,17.78 v50.8,15.08 | C4.+ 47.15,47.78 50.32,44.61 v50.32,38.73
VBUS
  Top 0.406: D2.2 9.73,9.21 USB->.VBUS
VCP-2
  Top 0.406: M2.3 50.07,9.14 50.32,8.89 50.32,5.4 49.69,4.76 C7.2
VIN
  Top 1.676: D1.A 68.47,53.04 | 68.47,53.04 J1.VIN1 | J1.VIN0 68.47,53.04
VPIC  (via drill 0.5)
  Top 0.406: 15.16,9.29 15.53,9.66 IC2.1 14.51,14.06 13.34,15.24 13.34,17.46 v11.27,19.53 | C17.1 16.03,8.41 15.16,9.29 | D2.1 14.72,9.29 15.16,9.29 | R18.2 4.57,21.18 ICSP.2
  Bottom 0.406: v11.27,19.53 9.37,21.43 1.59,21.43 1.43,21.27 ICSP.2
VUSB
  Top 0.406: IC2.17 6.53,16.01 5.87,16.67 C13.2 5.71,16.67

## Text on the board
tNames: Thomas Carpenter (2012) | 12v (4A Max) | A1 | A2 | B2 | S2 | B1 | A1 | A2 | B2 | B1 | AstroEQ | Controller | V3.0-SMD